# EAGLE board vr60 (EAGLE 9.6.2)
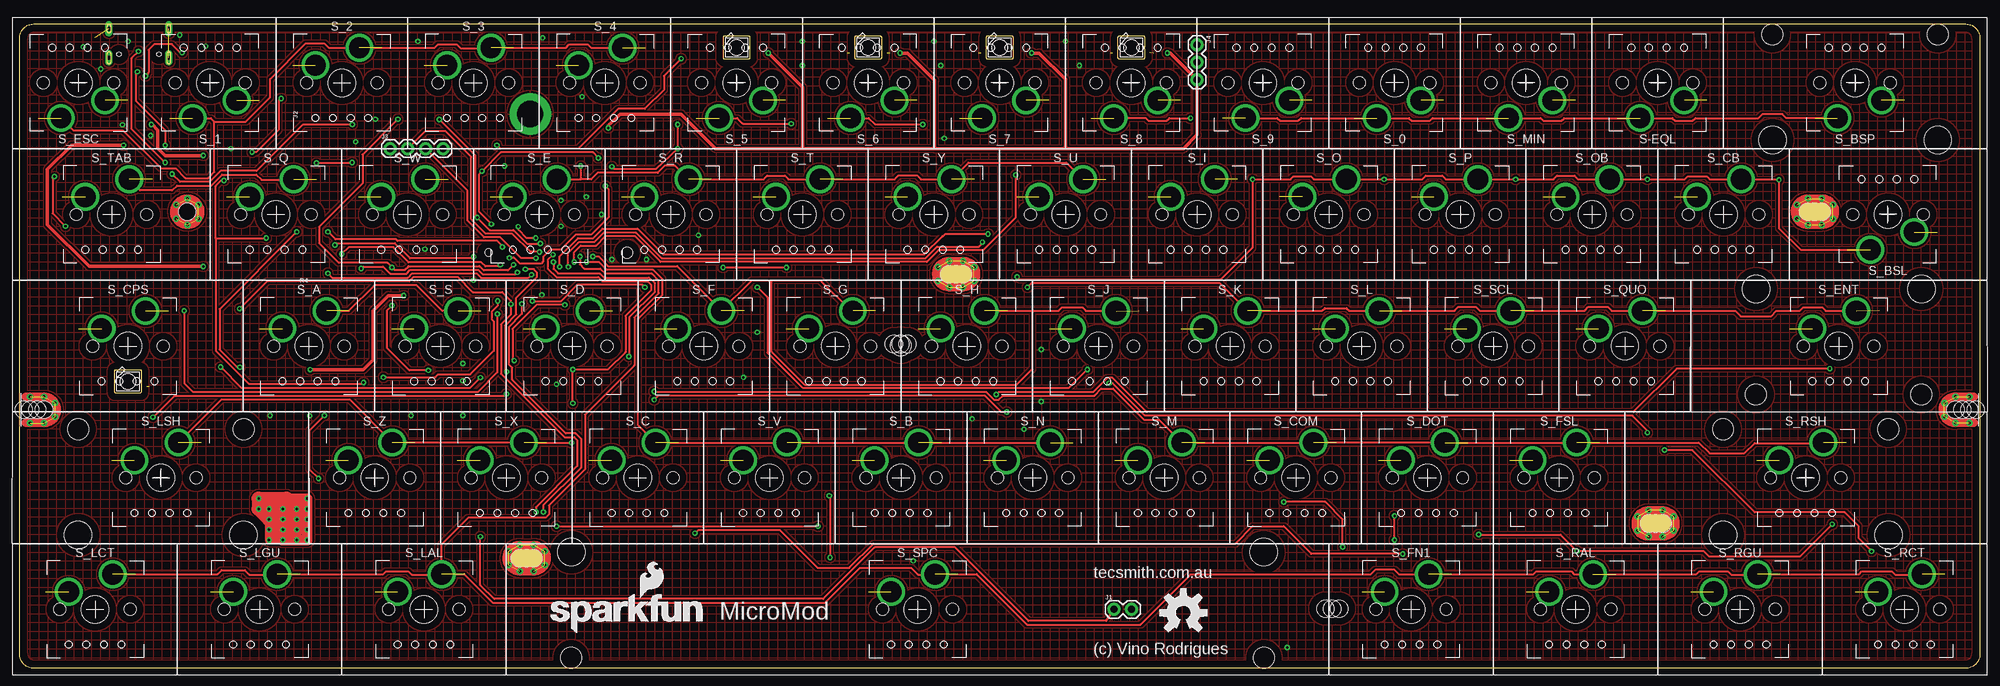
[diagram p0: board, top side]
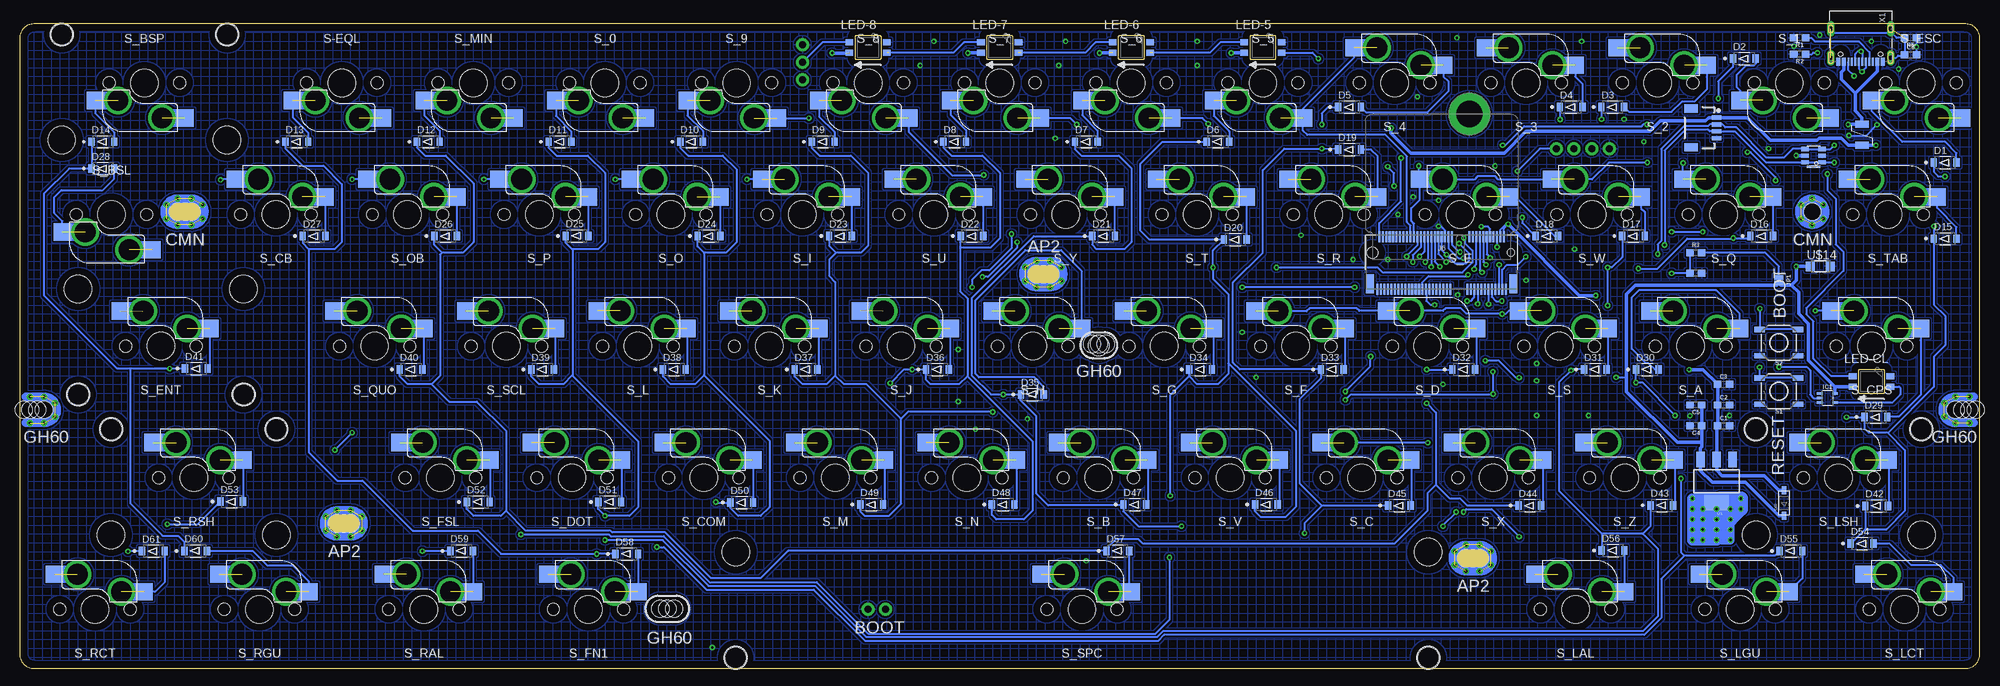
[diagram p1: board, bottom side, seen from below]

Size 283 x 93 mm. Coordinates in mm from the lower left corner, seen from the top.
Outline: 283,91 283,2 arc-90 281,0 2,0 arc-90 0,2 0,91 arc-90 2,93 281,93 arc-90 283,91
Copper layers (1*16): Top 0.035mm / dielectric 1.5mm / Bottom 0.035mm
Design rules "default *": minimum track width 10mil, minimum drill 0.35mm, track to track 10mil, track to pad 10mil, pad to pad 10mil, via to via 10mil, smd to smd 10mil, copper to edge 40mil, drill to drill 10mil, minimum pad ring 10mil, minimum via ring 8mil, stop-mask expansion 4mil, vias tented up to drill 0mil, thermal gap 10mil
Net classes: 0 default: width 0 mm, drill 0 mm
Holes 3 mm at 127.2,46.6
Holes 2.5 mm at 24.2,65.9 259.05,65.9 127.2,46.8 1.5,37.3 281.5,37.3 189.5,8.6 135.2,56.9 73.2,15.9 236.2,20.9 128.2,46.8 126.2,46.8 188.5,8.6 190.5,8.6

## Footprints (pad centres in the part's own frame; a part is rotated, then mirrored left to right if it is on the bottom)
MX-STABS-200U = hole 3.988: -11.938,8.255; 11.938,8.255 | hole 3.048: -11.938,-6.985; 11.938,-6.985
MX-STABS-625U = hole 3.988: -50,8.255; 50,8.255 | hole 3.048: -50,-6.985; 50,-6.985
0603 = smd 1.1 x 1: 1 -0.85,0; 2 0.85,0
SOD-123 = smd 0.914 x 1.219: A 1.638,0; C -1.638,0
SOD-123' = smd 1.2 x 0.7: A 1.85,0; C -1.85,0
STAND-OFF-REFLOW-M2.5 = drill 3.8 pad 6: 1 0,0
SC-74A = smd 0.375 x 0.825: 1 -0.65,-1.087; 2 0,-1.087; 3 0.65,-1.087; 4 0.65,1.087; 5 -0.65,1.087
1X02 = drill 1.016 pad 1.88: 1 0,0; 2 2.54,0
1X04_1MM_RA = smd 0.6 x 1.35: 1 -1.5,0; 2 -0.5,0; 3 0.5,0; 4 1.5,0 | smd 1.2 x 2: NC1 2.8,-3.675; NC2 -2.8,-3.675
1X04 = drill 1.016 pad 1.88: 1 0,0; 2 2.54,0; 3 5.08,0; 4 7.62,0
1X03 = drill 1.016 pad 1.88: 1 0,0; 2 2.54,0; 3 5.08,0
M.2-CONNECTOR-E = smd 0.3 x 1.55: 1 9.25,-5.275; 2 9,2.275; 3 8.75,-5.275; 4 8.5,2.275; 5 8.25,-5.275; 6 8,2.275; 7 7.75,-5.275; 8 7.5,2.275; 9 7.25,-5.275; 10 7,2.275; 11 6.75,-5.275; 12 6.5,2.275; 13 6.25,-5.275; 14 6,2.275; 15 5.75,-5.275; 16 5.5,2.275; 17 5.25,-5.275; 18 5,2.275; 19 4.75,-5.275; 20 4.5,2.275; 21 4.25,-5.275; 22 4,2.275; 23 3.75,-5.275; 32 1.5,2.275; 33 1.25,-5.275; 34 1,2.275; 35 0.75,-5.275; 36 0.5,2.275; 37 0.25,-5.275; 38 0,2.275; 39 -0.25,-5.275; 40 -0.5,2.275; 41 -0.75,-5.275; 42 -1,2.275; 43 -1.25,-5.275; 44 -1.5,2.275; 45 -1.75,-5.275; 46 -2,2.275; 47 -2.25,-5.275; 48 -2.5,2.275; 49 -2.75,-5.275; 50 -3,2.275; 51 -3.25,-5.275; 52 -3.5,2.275; 53 -3.75,-5.275; 54 -4,2.275; 55 -4.25,-5.275; 56 -4.5,2.275; 57 -4.75,-5.275; 58 -5,2.275; 59 -5.25,-5.275; 60 -5.5,2.275; 61 -5.75,-5.275; 62 -6,2.275; 63 -6.25,-5.275; 64 -6.5,2.275; 65 -6.75,-5.275; 66 -7,2.275; 67 -7.25,-5.275; 68 -7.5,2.275; 69 -7.75,-5.275; 70 -8,2.275; 71 -8.25,-5.275; 72 -8.5,2.275; 73 -8.75,-5.275; 74 -9,2.275; 75 -9.25,-5.275 | smd 1.2 x 2.75: A1 10.35,-4.5; A2 -10.35,-4.5 | hole 1.1: 10,0 | hole 1.6: -10,0
SMT-JUMPER_2_NC_PASTE_NO-SILK = smd 0.635 x 1.27: 1 -0.406,0; 2 0.406,0
SK6812-E-MILL = smd 1.1 x 0.9 bottom: 1-VDD 2.7,-0.749; 2-DOUT 2.7,0.751; 3-GND -2.7,0.751; 4-DIN -2.7,-0.749
TACTILE_SWITCH_SMD_5.2MM = smd 1.524 x 0.762: 1 -2.794,1.905; 2 2.794,1.905; 3 -2.794,-1.905; 4 2.794,-1.905
MX-5-PIN-HOTSWAP-PAD = smd 2.55 x 2.5 bottom: P$1 -7.085,2.54; P$2 5.842,5.08 | drill 3 pad 3.75: P$3 -3.81,2.54; P$4 2.54,5.08 | hole 3.988: 0,0 | hole 1.75: -5.08,0; 5.08,0
MOUNTING-HOLE-WIDE = drill 0.4: P$2 -1,-1.9; P$3 -1,1.9; P$4 1,1.9; P$5 1,-1.9; P$7 2.6,-1; P$8 2.6,1; P$9 -2.6,1; P$10 -2.6,-1 | hole 2.5: -1,0; 1,0; 0,0
MOUNTING-HOLE = drill 0.4: P$2 0,-1.9; P$3 0,1.9; P$7 1.6,-1; P$8 1.6,1; P$9 -1.6,1; P$10 -1.6,-1 | hole 2.5: 0,0
MOUNTING-HOLE-VWIDE-C = drill 0.4: P$1 0,1.9; P$4 2,1.9; P$5 2,-1.9; P$6 0,-1.9; P$7 3.6,-1; P$8 3.6,1 | hole 2.5: 2,0; 0,0; 1,0; -0.9,0
SOT223 = smd 1.219 x 2.235: 1 -2.311,-3.099; 2 0,-3.099; 3 2.311,-3.099 | smd 3.6 x 2.2: 4 0,3.099
SOT-23-6L = smd 0.6 x 1.1: P$1 -0.95,-1.25; P$2 0,-1.25; P$3 0.95,-1.25; P$4 0.95,1.25; P$5 0,1.25; P$6 -0.95,1.25
SMD_PTC = smd 1 x 1.9: P$1 -1.5,0; P$2 1.5,0
SOD123FL-BI = smd 1.3 x 1.4: P$1 -1.45,0; P$2 1.45,0
USB_C_CUSB31-CFM2AX-01-X = smd 0.575 x 1.15: A1B12 -3.2,7.355; A4B9 -2.4,7.355; B1A12 3.2,7.355; B4A9 2.4,7.355 | smd 0.275 x 1.15: A5 -1.25,7.355; A6 -0.25,7.355; A7 0.25,7.355; A8 1.25,7.355; B5 1.75,7.355; B6 0.75,7.355; B7 -0.75,7.355; B8 -1.75,7.355 | drill 0.6 pad 1 long: M1 -4.32,6.78; M2 4.32,6.78; M3 -4.32,2.6; M4 4.32,2.6 | hole 0.65: 2.89,6.28; -2.89,6.28

## Placement (x,y rotation side)
B14  MX-STABS-200U  [MX-STABS-200U]  265,84.5 180 top
B41  MX-STABS-200U  [MX-STABS-200U]  262.62,46.5 0 top
B42  MX-STABS-200U  [MX-STABS-200U]  20.38,27.5 180 top
B53  MX-STABS-200U  [MX-STABS-200U]  257.88,27.5 180 top
B57  MX-STABS-625U  [MX-STABS-625U]  129.62,8.5 0 top
C1  0.1uF  [0603]  37,35 0 bottom
C2  0.22uF  [0603]  37,38 0 bottom
C3  1nF  [0603]  37,41 0 bottom
C4  0.1uF  [0603]  41,35 180 bottom
C5  0.22uF  [0603]  41,38 180 bottom
C6  4.7nF  [0603]  10,88.55 0 bottom
D1  [SOD-123]  5,73 0 bottom
D2  [SOD-123]  34,88 0 bottom
D3  [SOD-123]  53,81 0 bottom
D4  [SOD-123]  59,81 0 bottom
D5  [SOD-123]  91,81 0 bottom
D6  [SOD-123]  110,76 0 bottom
D7  [SOD-123]  129,76 0 bottom
D8  [SOD-123]  148,76 0 bottom
D9  [SOD-123]  167,76 0 bottom
D10  [SOD-123]  186,76 0 bottom
D11  [SOD-123]  205,76 0 bottom
D12  [SOD-123]  224,76 0 bottom
D13  [SOD-123]  243,76 0 bottom
D14  [SOD-123]  271,76 0 bottom
D15  [SOD-123]  5,62 0 bottom
D16  [SOD-123]  31.5,62.38 0 bottom
D17  [SOD-123]  50,62.38 0 bottom
D18  [SOD-123]  62.5,62.38 0 bottom
D19  [SOD-123]  91,74.88 0 bottom
D20  [SOD-123]  107.5,61.88 0 bottom
D21  [SOD-123]  126.5,62.38 0 bottom
D22  [SOD-123]  145.5,62.38 0 bottom
D23  [SOD-123]  164.5,62.38 0 bottom
D24  [SOD-123]  183.5,62.38 0 bottom
D25  [SOD-123]  202.55,62.42 0 bottom
D26  [SOD-123]  221.5,62.38 0 bottom
D27  [SOD-123]  240.5,62.38 0 bottom
D28  [SOD-123]  271,72.12 0 bottom
D29  [SOD-123]  15,36.25 0 bottom
D30  [SOD-123]  48,43.12 0 bottom
D31  [SOD-123]  55.5,43.12 0 bottom
D32  [SOD-123]  74.5,43.12 0 bottom
D33  [SOD-123]  93.5,43.12 0 bottom
D34  [SOD-123]  112.5,43.12 0 bottom
D35  [SOD-123]  136.8,39.52 0 bottom
D36  [SOD-123]  150.5,43.12 0 bottom
D37  [SOD-123]  169.5,43.12 0 bottom
D38  [SOD-123]  188.5,43.12 0 bottom
D39  [SOD-123]  207.5,43.12 0 bottom
D40  [SOD-123]  226.5,43.12 0 bottom
D41  [SOD-123]  257.5,43.25 0 bottom
D42  [SOD-123]  14.9,23.45 0 bottom
D43  [SOD-123]  45.9,23.52 0 bottom
D44  [SOD-123]  64.95,23.48 0 bottom
D45  [SOD-123]  83.8,23.48 0 bottom
D46  [SOD-123]  103,23.62 0 bottom
D47  [SOD-123]  122,23.62 0 bottom
D48  [SOD-123]  141,23.62 0 bottom
D49  [SOD-123]  160,23.62 0 bottom
D50  [SOD-123]  178.75,23.93 0 bottom
D51  [SOD-123]  197.8,24.02 0 bottom
D52  [SOD-123]  216.8,24.02 0 bottom
D53  [SOD-123]  252.4,24.05 0 bottom
D54  [SOD-123]  17,18 0 bottom
D55  [SOD-123]  27.25,16.95 0 bottom
D56  [SOD-123]  52.95,17 0 bottom
D57  [SOD-123]  124.45,16.95 0 bottom
D58  [SOD-123]  195.35,16.5 0 bottom
D59  [SOD-123]  219.2,16.95 0 bottom
D60  [SOD-123]  257.6,16.95 0 bottom
D61  [SOD-123]  263.7,16.9 0 bottom
D62  1N4148  [SOD-123']  28.25,23.85 90 bottom
H5  STAND-OFF-REFLOW2.5MM_TALL  [STAND-OFF-REFLOW-M2.5]  73.7,80 0 top
IC1  MC74VHC1G50  [SC-74A]  22,39 270 bottom
J1  [1X02]  158,8.5 0 top
J2  [1X04_1MM_RA]  38,78 270 bottom
J3  [1X04]  53.5,75 0 top
J4  [1X03]  170,90 270 top
J6  MICROMOD-2222-C  [M.2-CONNECTOR-E]  77.7,60 0 bottom
JP1  OPT  [SMT-JUMPER_2_NC_PASTE_NO-SILK]  29,56 270 bottom
LED-5  SK6812-E-REVERSE  [SK6812-E-MILL]  103.5,89.6 0 top
LED-6  SK6812-E-REVERSE  [SK6812-E-MILL]  122.5,89.6 0 top
LED-7  SK6812-E-REVERSE  [SK6812-E-MILL]  141.5,89.6 0 top
LED-8  SK6812-E-REVERSE  [SK6812-E-MILL]  160.5,89.6 0 top
LED-CL  SK6812-E-REVERSE  [SK6812-E-MILL]  15.62,41.4 0 top
LOGO1  OSHW-LOGOL  [OSHW-LOGO-L]  168,8 0 top
R1  1.5k  [0603]  26,91 180 bottom
R2  1.5k  [0603]  26,88.65 180 bottom
R3  150k  [0603]  41,60 0 bottom
R4  75K  [0603]  41,57 180 bottom
R5  1000K  [0603]  10,91 180 bottom
S1  Reset  [TACTILE_SWITCH_SMD_5.2MM]  29,40 180 bottom
S2  BOOT  [TACTILE_SWITCH_SMD_5.2MM]  29,47 180 bottom
S-EQL  MX-5-PIN-HOTSWAP-PAD  [MX-5-PIN-HOTSWAP-PAD]  236.5,84.5 180 top
S_0  MX-5-PIN-HOTSWAP-PAD  [MX-5-PIN-HOTSWAP-PAD]  198.5,84.5 180 top
S_1  MX-5-PIN-HOTSWAP-PAD  [MX-5-PIN-HOTSWAP-PAD]  27.5,84.5 180 top
S_2  MX-5-PIN-HOTSWAP-PAD  [MX-5-PIN-HOTSWAP-PAD]  46.5,84.5 0 top
S_3  MX-5-PIN-HOTSWAP-PAD  [MX-5-PIN-HOTSWAP-PAD]  65.5,84.5 0 top
S_4  MX-5-PIN-HOTSWAP-PAD  [MX-5-PIN-HOTSWAP-PAD]  84.5,84.5 0 top
S_5  MX-5-PIN-HOTSWAP-PAD  [MX-5-PIN-HOTSWAP-PAD]  103.5,84.5 180 top
S_6  MX-5-PIN-HOTSWAP-PAD  [MX-5-PIN-HOTSWAP-PAD]  122.5,84.5 180 top
S_7  MX-5-PIN-HOTSWAP-PAD  [MX-5-PIN-HOTSWAP-PAD]  141.5,84.5 180 top
S_8  MX-5-PIN-HOTSWAP-PAD  [MX-5-PIN-HOTSWAP-PAD]  160.5,84.5 180 top
S_9  MX-5-PIN-HOTSWAP-PAD  [MX-5-PIN-HOTSWAP-PAD]  179.5,84.5 180 top
S_A  MX-5-PIN-HOTSWAP-PAD  [MX-5-PIN-HOTSWAP-PAD]  41.75,46.5 0 top
S_B  MX-5-PIN-HOTSWAP-PAD  [MX-5-PIN-HOTSWAP-PAD]  127.25,27.5 0 top
S_BSL  MX-5-PIN-HOTSWAP-PAD  [MX-5-PIN-HOTSWAP-PAD]  269.75,65.5 180 top
S_BSP  MX-5-PIN-HOTSWAP-PAD  [MX-5-PIN-HOTSWAP-PAD]  265,84.5 180 top
S_C  MX-5-PIN-HOTSWAP-PAD  [MX-5-PIN-HOTSWAP-PAD]  89.25,27.5 0 top
S_CB  MX-5-PIN-HOTSWAP-PAD  [MX-5-PIN-HOTSWAP-PAD]  246,65.5 0 top
S_COM  MX-5-PIN-HOTSWAP-PAD  [MX-5-PIN-HOTSWAP-PAD]  184.25,27.5 0 top
S_CPS  MX-5-PIN-HOTSWAP-PAD  [MX-5-PIN-HOTSWAP-PAD]  15.62,46.5 0 top
S_D  MX-5-PIN-HOTSWAP-PAD  [MX-5-PIN-HOTSWAP-PAD]  79.75,46.5 0 top
S_DOT  MX-5-PIN-HOTSWAP-PAD  [MX-5-PIN-HOTSWAP-PAD]  203.25,27.5 0 top
S_E  MX-5-PIN-HOTSWAP-PAD  [MX-5-PIN-HOTSWAP-PAD]  75,65.5 0 top
S_ENT  MX-5-PIN-HOTSWAP-PAD  [MX-5-PIN-HOTSWAP-PAD]  262.62,46.5 0 top
S_ESC  MX-5-PIN-HOTSWAP-PAD  [MX-5-PIN-HOTSWAP-PAD]  8.5,84.5 180 top
S_F  MX-5-PIN-HOTSWAP-PAD  [MX-5-PIN-HOTSWAP-PAD]  98.75,46.5 0 top
S_FN1  MX-5-PIN-HOTSWAP-PAD  [MX-5-PIN-HOTSWAP-PAD]  200.88,8.5 0 top
S_FSL  MX-5-PIN-HOTSWAP-PAD  [MX-5-PIN-HOTSWAP-PAD]  222.25,27.5 0 top
S_G  MX-5-PIN-HOTSWAP-PAD  [MX-5-PIN-HOTSWAP-PAD]  117.75,46.5 0 top
S_H  MX-5-PIN-HOTSWAP-PAD  [MX-5-PIN-HOTSWAP-PAD]  136.75,46.5 0 top
S_I  MX-5-PIN-HOTSWAP-PAD  [MX-5-PIN-HOTSWAP-PAD]  170,65.5 0 top
S_J  MX-5-PIN-HOTSWAP-PAD  [MX-5-PIN-HOTSWAP-PAD]  155.75,46.5 0 top
S_K  MX-5-PIN-HOTSWAP-PAD  [MX-5-PIN-HOTSWAP-PAD]  174.75,46.5 0 top
S_L  MX-5-PIN-HOTSWAP-PAD  [MX-5-PIN-HOTSWAP-PAD]  193.75,46.5 0 top
S_LAL  MX-5-PIN-HOTSWAP-PAD  [MX-5-PIN-HOTSWAP-PAD]  58.38,8.5 0 top
S_LCT  MX-5-PIN-HOTSWAP-PAD  [MX-5-PIN-HOTSWAP-PAD]  10.88,8.5 0 top
S_LGU  MX-5-PIN-HOTSWAP-PAD  [MX-5-PIN-HOTSWAP-PAD]  34.62,8.5 0 top
S_LSH  MX-5-PIN-HOTSWAP-PAD  [MX-5-PIN-HOTSWAP-PAD]  20.38,27.5 0 top
S_M  MX-5-PIN-HOTSWAP-PAD  [MX-5-PIN-HOTSWAP-PAD]  165.25,27.5 0 top
S_MIN  MX-5-PIN-HOTSWAP-PAD  [MX-5-PIN-HOTSWAP-PAD]  217.5,84.5 180 top
S_N  MX-5-PIN-HOTSWAP-PAD  [MX-5-PIN-HOTSWAP-PAD]  146.25,27.5 0 top
S_O  MX-5-PIN-HOTSWAP-PAD  [MX-5-PIN-HOTSWAP-PAD]  189,65.5 0 top
S_OB  MX-5-PIN-HOTSWAP-PAD  [MX-5-PIN-HOTSWAP-PAD]  227,65.5 0 top
S_P  MX-5-PIN-HOTSWAP-PAD  [MX-5-PIN-HOTSWAP-PAD]  208,65.5 0 top
S_Q  MX-5-PIN-HOTSWAP-PAD  [MX-5-PIN-HOTSWAP-PAD]  37,65.5 0 top
S_QUO  MX-5-PIN-HOTSWAP-PAD  [MX-5-PIN-HOTSWAP-PAD]  231.75,46.5 0 top
S_R  MX-5-PIN-HOTSWAP-PAD  [MX-5-PIN-HOTSWAP-PAD]  94,65.5 0 top
S_RAL  MX-5-PIN-HOTSWAP-PAD  [MX-5-PIN-HOTSWAP-PAD]  224.62,8.5 0 top
S_RCT  MX-5-PIN-HOTSWAP-PAD  [MX-5-PIN-HOTSWAP-PAD]  272.12,8.5 0 top
S_RGU  MX-5-PIN-HOTSWAP-PAD  [MX-5-PIN-HOTSWAP-PAD]  248.38,8.5 0 top
S_RSH  MX-5-PIN-HOTSWAP-PAD  [MX-5-PIN-HOTSWAP-PAD]  257.88,27.5 0 top
S_S  MX-5-PIN-HOTSWAP-PAD  [MX-5-PIN-HOTSWAP-PAD]  60.75,46.5 0 top
S_SCL  MX-5-PIN-HOTSWAP-PAD  [MX-5-PIN-HOTSWAP-PAD]  212.75,46.5 0 top
S_SPC  MX-5-PIN-HOTSWAP-PAD  [MX-5-PIN-HOTSWAP-PAD]  129.62,8.5 0 top
S_T  MX-5-PIN-HOTSWAP-PAD  [MX-5-PIN-HOTSWAP-PAD]  113,65.5 0 top
S_TAB  MX-5-PIN-HOTSWAP-PAD  [MX-5-PIN-HOTSWAP-PAD]  13.25,65.5 0 top
S_U  MX-5-PIN-HOTSWAP-PAD  [MX-5-PIN-HOTSWAP-PAD]  151,65.5 0 top
S_V  MX-5-PIN-HOTSWAP-PAD  [MX-5-PIN-HOTSWAP-PAD]  108.25,27.5 0 top
S_W  MX-5-PIN-HOTSWAP-PAD  [MX-5-PIN-HOTSWAP-PAD]  56,65.5 0 top
S_X  MX-5-PIN-HOTSWAP-PAD  [MX-5-PIN-HOTSWAP-PAD]  70.25,27.5 0 top
S_Y  MX-5-PIN-HOTSWAP-PAD  [MX-5-PIN-HOTSWAP-PAD]  132,65.5 0 top
S_Z  MX-5-PIN-HOTSWAP-PAD  [MX-5-PIN-HOTSWAP-PAD]  51.25,27.5 0 top
SA1  MOUNTING-HOLE-WIDE  [MOUNTING-HOLE-WIDE]  73.2,15.9 0 top
SA2  MOUNTING-HOLE-WIDE  [MOUNTING-HOLE-WIDE]  135.2,56.9 0 top
SA3  MOUNTING-HOLE-WIDE  [MOUNTING-HOLE-WIDE]  236.2,20.9 0 top
SC1  MOUNTING-HOLE  [MOUNTING-HOLE]  24.2,65.9 0 top
SC2  MOUNTING-HOLE-WIDE  [MOUNTING-HOLE-WIDE]  259.2,65.9 0 top
SG1  MOUNTING-HOLE-VWIDEEDGE-CUT  [MOUNTING-HOLE-VWIDE-C]  1.5,37.3 0 top
SG4  MOUNTING-HOLE-VWIDEEDGE-CUT  [MOUNTING-HOLE-VWIDE-C]  281.5,37.3 180 top
U1  [SOT223]  38,27 180 bottom
U$3  ESD_SRV05-4  [SOT-23-6L]  24,74 90 bottom
U$5  SPARKFUN_LOGO0.2  [SFE_LOGO_NAME_FLAME_.2]  76,5 0 top
U$7  PTC_ASMD1206  [SMD_PTC]  17,77 270 bottom
U$14  TVS_SMF9.0CA  [SOD123FL-BI]  23,58 0 bottom
X1  [USB_C_CUSB31-CFM2AX-01-X]  17.2,94.9 180 bottom
Z1  MX-FPRINT-100U19  [MX-FPRINT-1900-100U]  8.5,84.5 90 top
Z2  MX-FPRINT-100U19  [MX-FPRINT-1900-100U]  27.5,84.5 90 top
Z3  MX-FPRINT-100U19  [MX-FPRINT-1900-100U]  46.5,84.5 0 top
Z4  MX-FPRINT-100U19  [MX-FPRINT-1900-100U]  65.5,84.5 0 top
Z5  MX-FPRINT-100U19  [MX-FPRINT-1900-100U]  84.5,84.5 0 top
Z6  MX-FPRINT-100U19  [MX-FPRINT-1900-100U]  103.5,84.5 0 top
Z7  MX-FPRINT-100U19  [MX-FPRINT-1900-100U]  122.5,84.5 0 top
Z8  MX-FPRINT-100U19  [MX-FPRINT-1900-100U]  141.5,84.5 0 top
Z9  MX-FPRINT-100U19  [MX-FPRINT-1900-100U]  160.5,84.5 90 top
Z10  MX-FPRINT-100U19  [MX-FPRINT-1900-100U]  179.5,84.5 0 top
Z11  MX-FPRINT-100U19  [MX-FPRINT-1900-100U]  198.5,84.5 270 top
Z12  MX-FPRINT-100U19  [MX-FPRINT-1900-100U]  217.5,84.5 0 top
Z13  MX-FPRINT-100U19  [MX-FPRINT-1900-100U]  236.5,84.5 0 top
Z14  MX-FPRINT-200U19  [MX-FPRINT-1900-200U]  265,84.5 0 top
Z15  MX-FPRINT-150U19  [MX-FPRINT-1900-150U]  13.25,65.5 0 top
Z16  MX-FPRINT-100U19  [MX-FPRINT-1900-100U]  37,65.5 0 top
Z17  MX-FPRINT-100U19  [MX-FPRINT-1900-100U]  56,65.5 0 top
Z18  MX-FPRINT-100U19  [MX-FPRINT-1900-100U]  75,65.5 90 top
Z19  MX-FPRINT-100U19  [MX-FPRINT-1900-100U]  94,65.5 0 top
Z20  MX-FPRINT-100U19  [MX-FPRINT-1900-100U]  113,65.5 0 top
Z21  MX-FPRINT-100U19  [MX-FPRINT-1900-100U]  132,65.5 0 top
Z22  MX-FPRINT-100U19  [MX-FPRINT-1900-100U]  151,65.5 0 top
Z23  MX-FPRINT-100U19  [MX-FPRINT-1900-100U]  170,65.5 0 top
Z24  MX-FPRINT-100U19  [MX-FPRINT-1900-100U]  189,65.5 0 top
Z25  MX-FPRINT-100U19  [MX-FPRINT-1900-100U]  208,65.5 0 top
Z26  MX-FPRINT-100U19  [MX-FPRINT-1900-100U]  227,65.5 0 top
Z27  MX-FPRINT-100U19  [MX-FPRINT-1900-100U]  246,65.5 0 top
Z28  MX-FPRINT-150U19  [MX-FPRINT-1900-150U]  269.75,65.5 0 top
Z29  MX-FPRINT-175U19  [MX-FPRINT-1900-175U]  15.62,46.5 0 top
Z30  MX-FPRINT-100U19  [MX-FPRINT-1900-100U]  41.75,46.5 0 top
Z31  MX-FPRINT-100U19  [MX-FPRINT-1900-100U]  60.75,46.5 0 top
Z32  MX-FPRINT-100U19  [MX-FPRINT-1900-100U]  79.75,46.5 0 top
Z33  MX-FPRINT-100U19  [MX-FPRINT-1900-100U]  98.75,46.5 0 top
Z34  MX-FPRINT-100U19  [MX-FPRINT-1900-100U]  117.75,46.5 0 top
Z35  MX-FPRINT-100U19  [MX-FPRINT-1900-100U]  136.75,46.5 0 top
Z36  MX-FPRINT-100U19  [MX-FPRINT-1900-100U]  155.75,46.5 0 top
Z37  MX-FPRINT-100U19  [MX-FPRINT-1900-100U]  174.75,46.5 0 top
Z38  MX-FPRINT-100U19  [MX-FPRINT-1900-100U]  193.75,46.5 0 top
Z39  MX-FPRINT-100U19  [MX-FPRINT-1900-100U]  212.75,46.5 0 top
Z40  MX-FPRINT-100U19  [MX-FPRINT-1900-100U]  231.75,46.5 0 top
Z41  MX-FPRINT-225U19  [MX-FPRINT-1900-225U]  262.62,46.5 0 top
Z42  MX-FPRINT-225U19  [MX-FPRINT-1900-225U]  20.38,27.5 0 top
Z43  MX-FPRINT-100U19  [MX-FPRINT-1900-100U]  51.25,27.5 90 top
Z44  MX-FPRINT-100U19  [MX-FPRINT-1900-100U]  70.25,27.5 0 top
Z45  MX-FPRINT-100U19  [MX-FPRINT-1900-100U]  89.25,27.5 0 top
Z46  MX-FPRINT-100U19  [MX-FPRINT-1900-100U]  108.25,27.5 0 top
Z47  MX-FPRINT-100U19  [MX-FPRINT-1900-100U]  127.25,27.5 0 top
Z48  MX-FPRINT-100U19  [MX-FPRINT-1900-100U]  146.25,27.5 0 top
Z49  MX-FPRINT-100U19  [MX-FPRINT-1900-100U]  165.25,27.5 0 top
Z50  MX-FPRINT-100U19  [MX-FPRINT-1900-100U]  184.25,27.5 0 top
Z51  MX-FPRINT-100U19  [MX-FPRINT-1900-100U]  203.25,27.5 0 top
Z52  MX-FPRINT-100U19  [MX-FPRINT-1900-100U]  222.25,27.5 0 top
Z53  MX-FPRINT-275U19  [MX-FPRINT-1900-275U]  257.88,27.5 0 top
Z54  MX-FPRINT-125U19  [MX-FPRINT-1900-125U]  10.88,8.5 0 top
Z55  MX-FPRINT-125U19  [MX-FPRINT-1900-125U]  34.62,8.5 0 top
Z56  MX-FPRINT-125U19  [MX-FPRINT-1900-125U]  58.38,8.5 0 top
Z57  MX-FPRINT-625U19  [MX-FPRINT-1900-625U]  129.62,8.5 0 top
Z58  MX-FPRINT-125U19  [MX-FPRINT-1900-125U]  200.88,8.5 0 top
Z59  MX-FPRINT-125U19  [MX-FPRINT-1900-125U]  224.62,8.5 0 top
Z60  MX-FPRINT-125U19  [MX-FPRINT-1900-125U]  248.38,8.5 0 top
Z61  MX-FPRINT-125U19  [MX-FPRINT-1900-125U]  272.12,8.5 0 top

## Library data of the parts
B14 B41 B42 B53 B57 IC1 LED-5-LED-8 LED-CL S-EQL S_0 S_1-S_9 S_A S_B S_BSL S_BSP S_C S_CB S_COM S_CPS S_D S_DOT S_E S_ENT S_ESC S_F S_FN1 S_FSL S_G S_H S_I S_J S_K S_L S_LAL S_LCT S_LGU S_LSH S_M S_MIN S_N S_O S_OB S_P S_Q S_QUO S_R S_RAL S_RCT S_RGU S_RSH S_S S_SCL S_SPC S_T S_TAB S_U S_V S_W S_X S_Y S_Z SA1-SA3 SC1 SC2 SG1 SG4 U$3 U$7 U$14 X1 Z1-Z61 = ts_keyboards
C1 C4 C6 = SparkFun-Capacitors; PROD_ID: CAP-08604
C2 C5 = SparkFun-Capacitors; PROD_ID: CAP-07822
C3 = SparkFun-Capacitors; PROD_ID: CAP-07886
D1-D61 = jlcpcb_basic_parts
D62 = adafruit
H5 = SparkFun-Hardware; PROD_ID: HW-14899
J1 J4 = SparkFun-Connectors
J2 = __untitled
J3 = SparkFun-Connectors; PROD_ID: CONN-09696
J6 = SparkFun-MicroMod; PROD_ID: CONN-14877
JP1 = SparkFun-Jumpers
LOGO1 U$5 = random_logos
R1 R2 = SparkFun-Resistors; PROD_ID: RES-08306
R3 = SparkFun-Resistors; PROD_ID: RES-09117
R4 R5 = SparkFun-Resistors; PROD_ID: RES-09737
S1 S2 = SparkFun-Switches; PROD_ID: SWCH-14139
U1 = SparkFun-IC-Power; PROD_ID: VREG-08170

## Nets
!BOOT: J1.1 J6.11 S2.3 S2.4
!RESET: J6.6 S1.3 S1.4
A0: J3.3 J6.34
D+: J2.3 J6.3 U$3.P$1 U$3.P$6 X1.A6 X1.B6
D-: J2.2 J6.5 U$3.P$3 U$3.P$4 X1.A7 X1.B7
GND: C1.2 C2.2 C3.2 C4.2 C5.2 C6.2 H5.1 IC1.3 J1.2 J2.4 J3.1 J4.1 J6.1 J6.7 J6.33 J6.36 J6.39 J6.45 J6.75 LED-5.3-GND LED-6.3-GND LED-7.3-GND LED-8.3-GND LED-CL.3-GND R1.2 R2.2 R4.1 R5.1 S1.1 S1.2 S2.1 S2.2 U1.1 U$3.P$2 U$14.P$2 X1.A1B12 X1.B1A12
LED: IC1.2 J6.47
MX0: D1.C D9.C D15.C D23.C D29.C D37.C D42.C D49.C D54.C J6.18
MX1: D2.C D10.C D16.C D24.C D30.C D38.C D50.C D55.C J6.16
MX2: D3.C D11.C D17.C D25.C D31.C D39.C D43.C D51.C D56.C J6.14
MX3: D4.C D12.C D18.C D26.C D32.C D40.C D44.C D52.C D57.C J6.38
MX4: D5.C D13.C D19.C D27.C D33.C D45.C D58.C J6.12
MX5: D6.C D20.C D34.C D46.C D53.C D59.C J6.10
MX6: D7.C D14.C D21.C D28.C D35.C D41.C D47.C D60.C J6.17
MX7: D8.C D22.C D36.C D48.C D61.C J6.19
MY0: J6.56 S_1.P$2 S_1.P$4 S_2.P$2 S_2.P$4 S_3.P$2 S_3.P$4 S_4.P$2 S_4.P$4 S_5.P$2 S_5.P$4 S_6.P$2 S_6.P$4 S_7.P$2 S_7.P$4 S_ESC.P$2 S_ESC.P$4
MY1: J6.54 S_E.P$2 S_E.P$4 S_Q.P$2 S_Q.P$4 S_R.P$2 S_R.P$4 S_T.P$2 S_T.P$4 S_TAB.P$2 S_TAB.P$4 S_U.P$2 S_U.P$4 S_W.P$2 S_W.P$4 S_Y.P$2 S_Y.P$4
MY2: J6.52 S_A.P$2 S_A.P$4 S_CPS.P$2 S_CPS.P$4 S_D.P$2 S_D.P$4 S_F.P$2 S_F.P$4 S_G.P$2 S_G.P$4 S_H.P$2 S_H.P$4 S_J.P$2 S_J.P$4 S_S.P$2 S_S.P$4
MY3: J6.50 S_B.P$2 S_B.P$4 S_C.P$2 S_C.P$4 S_LSH.P$2 S_LSH.P$4 S_N.P$2 S_N.P$4 S_V.P$2 S_V.P$4 S_X.P$2 S_X.P$4 S_Z.P$2 S_Z.P$4
MY4: J6.48 S_FN1.P$2 S_FN1.P$4 S_LAL.P$2 S_LAL.P$4 S_LCT.P$2 S_LCT.P$4 S_LGU.P$2 S_LGU.P$4 S_RAL.P$2 S_RAL.P$4 S_RCT.P$2 S_RCT.P$4 S_RGU.P$2 S_RGU.P$4 S_SPC.P$2 S_SPC.P$4
MY5: J6.46 S-EQL.P$2 S-EQL.P$4 S_0.P$2 S_0.P$4 S_8.P$2 S_8.P$4 S_9.P$2 S_9.P$4 S_BSP.P$2 S_BSP.P$4 S_MIN.P$2 S_MIN.P$4
MY6: J6.44 S_BSL.P$2 S_BSL.P$4 S_CB.P$2 S_CB.P$4 S_I.P$2 S_I.P$4 S_O.P$2 S_O.P$4 S_OB.P$2 S_OB.P$4 S_P.P$2 S_P.P$4
MY7: J6.42 S_ENT.P$2 S_ENT.P$4 S_K.P$2 S_K.P$4 S_L.P$2 S_L.P$4 S_QUO.P$2 S_QUO.P$4 S_SCL.P$2 S_SCL.P$4
MY8: J6.40 S_COM.P$2 S_COM.P$4 S_DOT.P$2 S_DOT.P$4 S_FSL.P$2 S_FSL.P$4 S_M.P$2 S_M.P$4 S_RSH.P$2 S_RSH.P$4
N$1: D1.A S_ESC.P$1 S_ESC.P$3
N$2: D2.A S_1.P$1 S_1.P$3
N$3: D3.A S_2.P$1 S_2.P$3
N$4: D4.A S_3.P$1 S_3.P$3
N$5: D5.A S_4.P$1 S_4.P$3
N$6: D6.A S_5.P$1 S_5.P$3
N$7: D7.A S_6.P$1 S_6.P$3
N$8: D8.A S_7.P$1 S_7.P$3
N$9: D9.A S_8.P$1 S_8.P$3
N$10: D10.A S_9.P$1 S_9.P$3
N$11: D11.A S_0.P$1 S_0.P$3
N$12: D12.A S_MIN.P$1 S_MIN.P$3
N$13: D13.A S-EQL.P$1 S-EQL.P$3
N$14: D14.A S_BSP.P$1 S_BSP.P$3
N$15: D15.A S_TAB.P$1 S_TAB.P$3
N$16: D16.A S_Q.P$1 S_Q.P$3
N$17: D17.A S_W.P$1 S_W.P$3
N$18: D18.A S_E.P$1 S_E.P$3
N$19: D19.A S_R.P$1 S_R.P$3
N$20: D20.A S_T.P$1 S_T.P$3
N$21: D21.A S_Y.P$1 S_Y.P$3
N$22: D22.A S_U.P$1 S_U.P$3
N$23: D23.A S_I.P$1 S_I.P$3
N$24: D24.A S_O.P$1 S_O.P$3
N$25: D25.A S_P.P$1 S_P.P$3
N$26: D26.A S_OB.P$1 S_OB.P$3
N$27: D27.A S_CB.P$1 S_CB.P$3
N$28: D28.A S_BSL.P$1 S_BSL.P$3
N$29: LED-5.4-DIN LED-CL.2-DOUT
N$30: D30.A S_A.P$1 S_A.P$3
N$31: D31.A S_S.P$1 S_S.P$3
N$32: D32.A S_D.P$1 S_D.P$3
N$33: D33.A S_F.P$1 S_F.P$3
N$34: D34.A S_G.P$1 S_G.P$3
N$35: D35.A S_H.P$1 S_H.P$3
N$36: D36.A S_J.P$1 S_J.P$3
N$37: D37.A S_K.P$1 S_K.P$3
N$38: D38.A S_L.P$1 S_L.P$3
N$39: D39.A S_SCL.P$1 S_SCL.P$3
N$40: D40.A S_QUO.P$1 S_QUO.P$3
N$41: D41.A S_ENT.P$1 S_ENT.P$3
N$42: D42.A S_LSH.P$1 S_LSH.P$3
N$43: D43.A S_Z.P$1 S_Z.P$3
N$44: D44.A S_X.P$1 S_X.P$3
N$45: D45.A S_C.P$1 S_C.P$3
N$46: D46.A S_V.P$1 S_V.P$3
N$47: D47.A S_B.P$1 S_B.P$3
N$48: D48.A S_N.P$1 S_N.P$3
N$49: D49.A S_M.P$1 S_M.P$3
N$50: D50.A S_COM.P$1 S_COM.P$3
N$51: D51.A S_DOT.P$1 S_DOT.P$3
N$52: D52.A S_FSL.P$1 S_FSL.P$3
N$53: D53.A S_RSH.P$1 S_RSH.P$3
N$54: D54.A S_LCT.P$1 S_LCT.P$3
N$55: D55.A S_LGU.P$1 S_LGU.P$3
N$56: D56.A S_LAL.P$1 S_LAL.P$3
N$57: D57.A S_SPC.P$1 S_SPC.P$3
N$58: D58.A S_FN1.P$1 S_FN1.P$3
N$59: D59.A S_RAL.P$1 S_RAL.P$3
N$60: D60.A S_RGU.P$1 S_RGU.P$3
N$61: D61.A S_RCT.P$1 S_RCT.P$3
N$62: D29.A S_CPS.P$1 S_CPS.P$3
N$63: LED-5.2-DOUT LED-6.4-DIN
N$64: LED-6.2-DOUT LED-7.4-DIN
N$65: LED-7.2-DOUT LED-8.4-DIN
N$67: R1.1 X1.A5
N$68: JP1.1 R3.2
N$69: R2.1 X1.B5
N$70: IC1.4 LED-CL.4-DIN
N$71: C6.1 R5.2 X1.M1 X1.M2 X1.M3 X1.M4
N$72: J4.2 LED-8.2-DOUT
PWM: J3.2 J6.32
SA1: SA1.P$2 SA1.P$3 SA1.P$4 SA1.P$5 SA1.P$7 SA1.P$8 SA1.P$9 SA1.P$10
SA2: SA2.P$2 SA2.P$3 SA2.P$4 SA2.P$5 SA2.P$7 SA2.P$8 SA2.P$9 SA2.P$10
SA3: SA3.P$2 SA3.P$3 SA3.P$4 SA3.P$5 SA3.P$7 SA3.P$8 SA3.P$9 SA3.P$10
SC1: SC1.P$2 SC1.P$3 SC1.P$7 SC1.P$8 SC1.P$9 SC1.P$10
SC2: SC2.P$2 SC2.P$3 SC2.P$4 SC2.P$5 SC2.P$7 SC2.P$8 SC2.P$9 SC2.P$10
SG1: SG1.P$1 SG1.P$4 SG1.P$5 SG1.P$6 SG1.P$7 SG1.P$8
SG4: SG4.P$1 SG4.P$4 SG4.P$5 SG4.P$6 SG4.P$7 SG4.P$8
SINK: U1.4
SWDCK: J6.21
SWDIO: J6.23
VBUS: U$3.P$5 U$7.P$1 X1.A4B9 X1.B4A9
VCC: C1.1 C2.1 C3.1 D62.A J3.4 J6.2 J6.4 J6.74 U1.2
VIN/3: J6.49 R3.1 R4.2
VSUP: C4.1 C5.1 D62.C IC1.5 J2.1 J4.3 J6.9 JP1.2 LED-5.1-VDD LED-6.1-VDD LED-7.1-VDD LED-8.1-VDD LED-CL.1-VDD U1.3 U$7.P$2 U$14.P$1

## Tracks (layer width: path | path; a pad name or v marks a point on that pad's centre or on a via)
!BOOT  (via drill 0.35)
  Top 0.254: J1.1 156.85,6.85 145.65,6.85 135.05,17.45 123.45,17.45 116,10 68.5,10 66.5,12 v66.5,19 | v31.75,51.9 35.7,55.85 56.25,55.85 56.88,56.48 63.22,56.48 65.4,54.3 69.65,54.3 70.9,53.05 v70.9,52.55 70.9,51.05 69.5,49.65 69.5,42.5 78.65,33.35 80.05,33.35 80.5,32.9 80.5,29.21 74.55,23.25 v74.55,22.56
  Bottom 0.254: S2.3 S2.4 31.75,48.95 v31.75,51.9 | v70.9,52.55 70.95,52.6 J6.11 | v66.5,19 70.46,22.96 74.15,22.96 v74.55,22.56
!RESET  (via drill 0.35)
  Top 0.254: v69.7,60.8 69.7,60.95 68.95,61.7 54.54,61.7 54.34,61.9 45.6,61.9 v44.5,63 | v40,63 28.85,51.85 28.85,46 31.4,43.45 v31.8,43.45
  Bottom 0.254: J6.6 v69.7,60.8 | S1.3 S1.4 v31.8,43.45 | v44.5,63 v40,63
A0  (via drill 0.35)
  Top 0.254: v74.55,59.2 72.37,59.2 69.37,62.21 67.04,62.21 64.65,64.6 64.65,68.95 58.6,75 J3.3
  Bottom 0.254: J6.34 76.7,60.6 75.3,59.2 v74.55,59.2
D+  (via drill 0.35)
  Top 0.254: v21,73 16.2,77.8 16.2,88.1 v17.15,89.05 | v45.5,61.1 45.75,61.35 54.15,61.35 56.35,59.15 65.3,59.15 v65.55,59.4
  Bottom 0.254: X1.B6 17.95,88.7 17.6,89.05 v17.15,89.05 17.15,88.95 16.95,88.75 X1.A6 | v21,73 21.05,73.05 U$3.P$1 U$3.P$6 30.9,73.05 35.35,77.5 J2.3 39,77.5 39.25,77.75 42.5,77.75 45.5,74.75 v45.5,61.1 | v65.55,59.4 66.72,58.23 68.28,58.23 68.95,57.55 J6.3
D-  (via drill 0.35)
  Top 0.254: v17,86.1 16.75,85.85 16.75,81.9 21,77.65 v21,75.5 | v69.4,58.25 69.15,58 67.25,58 66.65,58.6 56.15,58.6 53.95,60.8 47.5,60.8 v46.5,59.8
  Bottom 0.254: X1.B7 16.45,86.65 v17,86.1 17.45,86.55 X1.A7 | v21,75.5 21.55,74.95 U$3.P$3 U$3.P$4 25.3,75 27,75 28.3,73.7 30.8,73.7 35.16,78.06 36.76,78.06 37.2,78.5 J2.2 39,78.5 39.24,78.26 42.71,78.26 46.01,74.96 46.01,61.69 46.5,61.2 v46.5,59.8 | v69.4,58.25 69.45,58.2 J6.5
GND  (via drill 0.35)
  Bottom 0.254: R5.1 v9.15,89.7 C6.2 | J6.36 77.2,63.2 77.8,63.8 v78.15,63.8 | v18.9,76.9 16.4,76.9 v14.85,78.45
  other vias: 183,3 98,62.5 70,72.5 77.5,41 57.5,90.5 75.5,91 58.5,60.5 147.5,46 78.15,67.55 90.5,59 85.5,59 81.8,68.05 132,90.5 133,87 153,87 151,90.5 133.5,76.5 113,90.5 113,87 36.15,36.5 41.85,36.45 26.85,89.8 11.7,86.5 15.65,90.5 23.1,91.4 81.2,82.5 84,65.5 75.4,53.9 137.5,36 104.5,42 64,44 30.5,75 65.5,56 64,41.5 64,36.5 56.5,36.5 129,15.5 51.35,79.25 48.5,76 145,34.5 147.5,38.5 106.5,48.5
  pour Top (hatched): 0,93 283,93 283,0 0,0
  pour Bottom (isolate 0.254, hatched): 0,93 283,93 283,0 0,0
LED  (via drill 0.35)
  Top 0.254: v66.5,41.95 64.99,40.44 32.06,40.44 v29,43.5 | v71.4,44.4 71.15,44.65 71.15,49 74.6,52.45 v78.7,52.45 v78.71,52.46
  Bottom 0.254: J6.47 79.93,54.7 79.93,53.02 79.29,52.46 v78.71,52.46 | v66.5,41.95 67,41.95 69.45,44.4 v71.4,44.4 | v29,43.5 25,43.5 24.5,43 24.5,39.5 24,39 IC1.2
MX0  (via drill 0.35)
  Top 0.254: v5,71 4.75,70.75 4.75,65.65 v6.6,63.8 | v19.25,36.25 22.35,39.35 70,39.35 v70.25,39.6 | v70.3,42.8 70.05,43.05 70.05,49.45 71.7,51.1 71.7,53.5 74.7,56.5 74.7,57.1 74.2,57.6 v73,57.6 | v142.5,37 141.7,37 139.35,39.35 92.2,39.35 v91.6,38.75
  Bottom 0.254: D1.C 6.64,71.64 6,71 v5,71 | v6.6,63.8 6.64,63.76 D15.C 6.64,52.5 5,50.86 5,46.64 6.64,45 6.64,40.6 13.24,34 | D54.C 16.54,20.1 | D42.C 16.54,20.1 | J6.18 72.72,62.25 72.72,58.28 73,58.01 v73,57.6 | D49.C 161.64,22.64 161,22 157.5,22 155.75,23.75 155.75,36 | 155.75,36 160.75,41 164,41 165.25,42.25 | D37.C 171.14,42.14 170,41 166.5,41 165.25,42.25 | D23.C 166.14,61 165.14,60 | 165.25,42.25 165.25,55.75 166.14,56.64 166.14,59 165.14,60 | D9.C 168.64,75.14 167.5,74 163,74 160.5,71.5 160.5,61 161.5,60 165.14,60 | v70.3,42.8 70.3,39.65 v70.25,39.6 70.35,39.5 90.85,39.5 v91.6,38.75 | v142.5,37 154.75,37 155.75,36 | 16.54,20.1 13.45,20.1 10.8,22.75 10.8,31.5 13.24,33.94 13.24,34 | v19.25,36.25 D29.C 16.64,34.64 16,34 13.24,34
MX1  (via drill 0.35)
  Top 0.254: v37.75,82.25 37.4,81.9 37.4,77.75 34.15,74.5 v33.55,74.5 | v29.5,70.42 29.1,70.42 28.3,69.62 28.3,62 | v71.85,57.15 71.6,56.9 66.8,56.9 66.2,57.5 56.4,57.5 55.85,56.95 53.5,56.95 52.46,57.99 49.59,57.99 v49.3,57.7 | v35.6,62.1 35.5,62 28.3,62 | v49.65,41.25 49.4,41 33.1,41 28.3,45.8 28.3,62 | v43.15,27.4 41.8,28.75 41.8,34.3 v44,36.5 | v191,17.5 191,21.5 188.5,24 v182.5,24
  Bottom 0.254: J6.16 72.2,57.5 v71.85,57.15 | D10.C 187.64,75.14 186.5,74 181.5,74 179.5,72 179.5,61.5 181,60 184.15,60 184.2,59.95 | D24.C 185.14,60.89 184.2,59.95 | 184.2,42.3 185.5,41 189,41 190.14,42.14 D38.C | 184.2,59.95 184.2,42.3 | 184.2,42.3 174.75,32.85 174.75,23.25 176,22 179.28,22 180.39,23.11 D50.C 182.43,23.93 v182.5,24 | D16.C 33.41,62.1 v35.6,62.1 35.7,62 42.25,62 46.55,57.7 v49.3,57.7 | D2.C 35.64,86.81 37.75,84.7 v37.75,82.25 | v33.55,74.5 33.1,74.5 29.5,70.9 v29.5,70.42 | D55.C 29.59,16.25 42.65,16.25 | v43.15,27.4 43.15,16.75 42.65,16.25 | v44,36.5 48.75,41.25 v49.65,41.25 49.64,41.26 D30.C | 42.65,16.25 45.99,12.91 45.99,7.26 48.45,4.8 117.76,4.8 118.58,3.98 160.98,3.98 168.35,11.35 183.85,11.35 190,17.5 v191,17.5
MX2  (via drill 0.35)
  Top 0.254: v54.6,79.25 49.5,74.15 49.5,70 43.2,63.7 43.2,61.35 46.05,58.5 53.1,58.5 v53.75,57.85 54.1,57.5 55.6,57.5 56.15,58.05 66.4,58.05 67,57.45 70.5,57.45 v71.3,58.25 | v59,43 56.25,43 53,46.25 53,51.6 v53.75,52.35 | v198.5,18.5 v198.5,22
  Bottom 0.254: v54.6,79.25 54.64,79.29 D3.C | D17.C 51.64,59.35 53.14,57.85 v53.75,57.85 v53.75,52.35 | J6.14 71.7,58.65 v71.3,58.25 | D11.C 206.64,75.14 205.5,74 201,74 198.5,71.5 198.5,61.5 199.5,60.5 203.2,60.5 | D25.C 204.19,61.44 203.25,60.5 203.2,60.5 | 203.2,60.5 203.2,42.3 203.22,42.27 | D39.C 209.14,42.14 208,41 204.5,41 203.22,42.27 | 203.22,42.27 193.7,32.75 193.7,23.25 194.95,22 v198.5,22 199.5,23 199.5,23.96 D51.C | D43.C 47.54,20.51 48.65,19.4 | 54.59,19.4 54.59,19.41 54.58,19.43 60.75,25.6 60.75,41.25 v59,43 58.88,43.12 D31.C | 54.59,19.4 D56.C | 48.65,19.4 54.59,19.4 | 48.65,19.4 46.5,17.25 46.5,7.5 48.64,5.36 48.67,5.36 48.66,5.35 117.93,5.35 118.79,4.49 160.75,4.49 168.16,11.9 183.55,11.9 183.56,11.89 190.17,18.5 v198.5,18.5
MX3  (via drill 0.35)
  Top 0.254: v60.6,79.2 65.75,74.05 65.75,65.35 v66.05,65.05 67.85,63.25 71.3,63.25 73.25,61.3 v75.16,61.3 | v77,59.7 76.25,58.95 76.25,57.7 77.5,56.45 83.55,56.45 84.15,55.85 90.65,55.85 91.15,55.35 91.15,54.55 87.45,50.85 87.45,45.65 84.91,43.11 v79.85,43.11 v79.85,38.25
  Bottom 0.254: v60.6,79.2 60.64,79.24 D4.C | D18.C 66.05,64.29 v66.05,65.05 | J6.38 77.7,60.4 v77,59.7 77,59.67 75.73,58.4 74.2,58.4 73.77,58.83 73.77,59.91 v75.16,61.3 | D12.C 225.64,75.14 224.5,74 221.5,74 217.5,70 217.5,61.5 219,60 222,60 | D26.C 223.14,61.14 222,60 | 222,60 222.3,59.7 222.3,42.2 223.5,41 | D40.C 228.14,42.14 227,41 223.5,41 | 223.5,41 221,38.5 217,38.5 212.8,34.3 212.8,22.7 | 212.8,22.7 213.5,22 217.5,22 218.5,23 218.5,23.96 D52.C | 212.8,22.7 209.95,19.85 197.7,19.85 197.45,19.6 189.8,19.6 183.2,13 176,13 172.05,16.95 D57.C 126.09,17.31 124.75,18.65 121.5,18.65 120.85,18 84.5,18 79.75,22.75 79.75,25.25 78.5,26.5 | D44.C 74,23.48 75.03,24.5 76.5,24.5 78.5,26.5 | v79.85,43.11 D32.C | 78.5,26.5 78.5,36.9 v79.85,38.25
MX4  (via drill 0.35)
  Top 0.254: v95,78.5 v95,75 91.82,72.05 85.85,72.05 v85.5,72.4 | v70.7,59.25 71.4,59.25 72.25,58.4 75.25,58.4 75.6,58.75 75.6,59.4 76.67,60.48 78.19,60.48 80.35,62.63 82.57,62.63 85,65.07 85,69.16 v84.56,69.6 | v97.5,19.5 97.95,19.95 109.75,19.95 115.2,14.5 119.75,14.5 123.25,18 175.5,18 178,20.5 182.5,20.5 186.5,16.5 v199.7,16.5
  Bottom 0.254: J6.12 71.2,59.75 v70.7,59.25 | v95,78.5 95,80.1 94.1,81 D5.C | D19.C 92.66,74.9 v95,75 100.4,75 103.5,71.9 103.5,60 107.8,55.7 107.8,44.1 106.83,43.12 D33.C 95.14,41.86 98.2,38.8 98.2,26.7 94.97,23.48 | v84.56,69.6 84.56,71.46 v85.5,72.4 | D13.C 244.64,75.04 242.15,72.55 239.15,72.55 236.5,69.9 236.5,61.5 237.5,60.5 241.25,60.5 | D27.C 242.14,61.39 241.25,60.5 | 241.25,60.5 241.25,31.2 237.15,27.1 233.5,27.1 226.25,19.85 216.85,19.85 213.5,16.5 v199.7,16.5 D58.C | D45.C 94.97,23.48 | 94.97,23.48 97.5,20.95 v97.5,19.5
MX5  (via drill 0.35)
  Top 0.254: v74.5,62.1 73.21,62.1 71.97,63.34 v71.97,63.74 | v101.55,57.85 v110.7,57.85 | v261.7,20.8 257.01,16.11 243.94,16.11 243.15,16.9 v224.85,16.9 222.45,19.3 v210.65,19.3 | v116.9,24.9 117,24.8 v117,16
  Bottom 0.254: J6.10 70.7,63.43 71.01,63.74 v71.97,63.74 | v101.55,57.85 86.95,57.85 86.25,57.15 74.7,57.15 73.26,58.59 73.26,60.27 74.28,61.29 74.28,61.88 v74.5,62.1 | D53.C 257.29,20.8 v261.7,20.8 | v224.85,16.9 224.8,16.95 D59.C | 108.5,44 108.5,54 110.7,56.2 v110.7,57.85 110.7,60.31 D20.C 119.88,61.88 121.15,63.15 121.15,72.85 118,76 D6.C | 108.5,44 108.5,42.5 110,41 113,41 114.14,42.14 | 114.14,42.14 D34.C | 114.14,42.14 114.15,42.15 116.9,39.4 v116.9,24.9 | 108.5,44 98.75,34.25 98.75,23.3 100.25,21.8 103.8,21.8 104.64,22.64 D46.C | v117,16 117,7 119,5 160.5,5 167.95,12.45 183.4,12.45 190.01,19.06 197.66,19.06 197.9,19.3 v210.65,19.3
MX6  (via drill 0.35)
  Top 0.254: v75.6,22.55 75.6,23.5 81.05,28.95 81.05,33.1 80.25,33.9 78.85,33.9 71.1,41.65 71.1,43.4 70.6,43.9 70.6,49.25 72.5,51.15 v72.5,52.6 | v77.5,20.5 v115.25,20.5 | v261.35,43.25 239.25,43.25 233,37 162.7,37 157.74,41.96 157.03,41.96 154.94,39.88 141.35,39.88 v141,39.52
  Bottom 0.254: D14.C D28.C 275.88,72.12 279.5,68.5 279.5,53.85 268.9,43.25 267,43.25 | D41.C v261.35,43.25 267,43.25 | 267,43.25 267,23.75 262.38,19.12 260.12,19.12 259.24,18.24 D60.C | D7.C 130.64,74.94 129.7,74 124.3,74 122.5,72.2 122.5,61.5 123.5,60.5 127.5,60.5 128.14,61.14 D21.C 136.57,62.38 145.55,53.4 145.55,42.3 142.78,39.52 v141,39.52 D35.C 138.5,39.46 138.5,38.7 136.2,36.4 136.2,25.2 134.5,23.5 123.76,23.5 D47.C 123.64,22.64 121.5,20.5 v115.25,20.5 | J6.17 72.45,52.65 v72.5,52.6 | v75.6,22.55 77.5,20.65 v77.5,20.5
MX7  (via drill 0.35)
  Top 0.254: v267.38,16.88 265.5,18.77 265.5,20.5 263.5,22.5 250.5,22.5 241.5,31.5 v237.5,31.5 | v235,34 235,34.3 232.85,36.45 162.5,36.45 157.8,41.15 v157.3,41.15 | v106.5,55 107.95,53.55 107.95,45.56 113.09,40.42 151.45,40.42 v154.15,43.12 | v74,53 78.15,53 80.49,55.34 89.91,55.34 v90.25,55
  Bottom 0.254: D8.C 149.64,75.14 148.5,74 144,74 141.5,71.5 141.5,62.05 142.85,60.7 147.14,60.7 | 147.14,60.7 D22.C | D61.C 267.37,16.9 v267.38,16.88 | v237.5,31.5 v235,34 | v157.3,41.15 155.32,43.12 v154.15,43.12 D36.C 152.14,41.64 151.5,41 147.35,41 146.18,42.17 146.15,42.15 | 146.15,42.15 136.75,32.75 136.75,22.75 138,21.5 142,21.5 142.64,22.14 D48.C | J6.19 73.02,54.65 73.02,53.48 73.5,53 v74,53 | v90.25,55 v106.5,55 | 147.14,60.7 147.14,54.38 146.15,53.39 146.15,42.15
MY0  (via drill 0.35)  (8 unrouted)
  Top 0.254: S_ESC.P$4 7.76,77.62 14.93,77.62 20.4,72.15 22.5,72.15 23.9,70.75 27.2,70.75 28.1,71.65 28.1,78.9 | S_1.P$4 27.58,79.42 28.1,78.9 | 28.1,78.9 32.65,78.9 36.15,82.4 36.15,85.05 41.3,90.2 43.95,90.2 44.57,89.58 S_2.P$4 59.93,89.58 60.4,90.05 63.1,90.05 63.65,89.5 67.96,89.5 S_3.P$4 78.88,89.58 79.35,90.05 82,90.05 82.47,89.58 S_4.P$4 | S_5.P$4 103.58,79.42 104.4,78.6 v111.4,78.6 | S_6.P$4 122.58,79.42 123.5,78.5 v130.4,78.5
  Bottom 0.254: J6.56 82.2,63.9 82.7,64.4 82.7,73.9 85.8,77 97.1,77 97.7,77.6 97.7,79.38 | 97.7,79.38 S_5.P$2 | S_4.P$2 90.34,88.16 97.7,80.8 97.7,79.38 | v111.4,78.6 112.22,79.42 S_6.P$2 | v130.4,78.5 131.32,79.42 S_7.P$2
MY1  (via drill 0.35)  (7 unrouted)
  Top 0.254: S_TAB.P$4 17.39,68.98 22,68.98 22.7,69.68 27.63,69.68 29.2,71.25 34.15,71.25 34.9,70.5 39.46,70.5 S_Q.P$4 | S_E.P$4 81,70.58 | 81,70.58 82.5,70.58 83.42,71.5 92.1,71.5 93.1,72.5 94.62,72.5 S_R.P$4 107.4,70.58 107.92,71.1 110.48,71.1 111,70.58 S_T.P$4 126.33,70.58 126.9,71.15 129.53,71.15 130.1,70.58 S_Y.P$4 136.96,73 151.12,73 S_U.P$4 | v81,72.5 81,70.58 | v42.85,72.95 42.9,73 v48,73
  Bottom 0.254: J6.54 81.7,64.17 82.1,64.56 82.1,66.4 80.84,67.66 S_E.P$2 81,70.74 v81,72.5 | S_W.P$2 61.87,70.55 69.5,70.55 69.95,71 72.55,71 73,70.55 77.51,70.55 S_E.P$4 | S_Q.P$2 v42.84,72.94 v42.85,72.95 | S_W.P$4 56,70.58 53.58,73 v48,73
MY2  (via drill 0.35)  (8 unrouted)
  Top 0.254: S_H.P$4 146.2,51.58 | 146.2,51.58 150,51.58 150.52,52.1 153.43,52.1 153.95,51.58 S_J.P$4 158.37,51.5 | 120,51.58 S_G.P$4 | v68.95,51.15 68.95,42.7 66.15,39.9 25,39.9 23.75,41.15 v23.75,51.6 | S_A.P$4 47.5,51.58 51.22,55.3 57.28,55.3 61,51.58 S_S.P$4 | v82.75,59.45 83.55,59.45 84.94,58.06 94.94,58.06 101.29,51.71 S_F.P$4 105.71,56 108.5,56 | 120.08,51.5 120,51.58 | 120,51.58 115.58,56 108.5,56 | 108.5,56 108.5,45.75 113.3,40.95 143.9,40.95 146.2,43.25 146.2,51.58
  Bottom 0.254: J6.52 81.2,61.05 82.75,59.5 v82.75,59.45 | S_S.P$2 68.02,51.58 68.45,51.15 v68.95,51.15 69.01,51.18 74.1,51.18 74.92,52 77.08,52 77.5,51.58 S_D.P$4 | S_D.P$2 89.58,51.58 90,52 96.7,52 97.2,51.5 101.21,51.5 S_F.P$4 | S_CPS.P$2 23.73,51.58 v23.75,51.6
MY3  (via drill 0.35)  (7 unrouted)
  Top 0.254: v81.85,58.65 83.6,58.65 84.75,57.5 91.45,57.5 92.8,56.15 92.8,53.95 89.3,50.45 89.3,35.07 S_C.P$4 S_V.P$4 S_B.P$4 S_N.P$4 | 53.87,32.58 S_X.P$4 79.67,32.58 v79.7,32.55 | 53.87,32.58 S_Z.P$4 | S_LSH.P$4 29.14,38.8 47.65,38.8 53.87,32.58
  Bottom 0.254: J6.50 80.7,60.8 81.85,59.65 v81.85,58.65 | v79.7,32.55 91.76,32.55 S_C.P$4
MY4  (via drill 0.35)  (8 unrouted)
  Top 0.254: S_LCT.P$4 28.58,13.58 29.15,14.15 32.5,14.15 33.15,13.5 37.09,13.5 S_LGU.P$4 52.48,13.58 52.9,14 56.1,14 56.6,13.5 60.84,13.5 | 60.84,13.5 S_LAL.P$4 64.17,13.58 68.3,9.45 116.25,9.45 121.3,14.5 128.7,14.5 129.7,13.5 132.09,13.5 S_SPC.P$4 138.17,13.58 145.45,6.3 161.8,6.3 169,13.5 195,13.5 195.75,14.25 198.45,14.25 199.2,13.5 203.34,13.5 S_FN1.P$4 218.58,13.58 219,14 224,14 224.42,13.58 S_RAL.P$4 242.08,13.58 242.5,14 246.6,14 247.1,13.5 250.84,13.5 S_RGU.P$4 265.58,13.58 266,14 270.3,14 270.8,13.5 274.58,13.5 S_RCT.P$4 | 60.84,13.5 60.84,17.84 64.75,21.75 75.9,21.75 76.4,22.25 76.4,23.5 81.6,28.7 81.6,36.6 88.75,43.75 88.75,50.65 92.25,54.15 92.25,55.95 91.28,56.92 84.58,56.92 83.8,57.7 81.5,57.7 80.9,58.3 v80.9,59.45
  Bottom 0.254: v80.9,59.45 80.2,60.15 J6.48
MY5  (via drill 0.35)  (6 unrouted)
  Top 0.254: v169.05,79.4 166,79.4 165.6,79 163,79 162.6,79.4 157.98,79.4 S_8.P$4 | v80.05,58.65 80.05,60.05 81,61 83.2,61 84.6,62.4 88.75,62.4 92.5,58.65 130.98,58.65 132.65,60.32 139.07,60.32 143.8,65.05 v143.8,71.2 | S_BSP.P$4 255.08,79.42 254.5,80 251.63,80 251.05,79.42 241.95,79.42 241.53,79 239.05,79 238.63,79.42 S-EQL.P$4 223,79.42 222.58,79 220.02,79 219.6,79.42 S_MIN.P$4 204,79.42 203.58,79 201,79 200.58,79.42 S_0.P$4 185,79.42 184.58,79 182,79 181.58,79.42 S_9.P$4
  Bottom 0.254: J6.46 79.7,59 v80.05,58.65 | S_9.P$2 169.07,79.42 v169.05,79.4 | S_8.P$2 154.66,77.46 148.4,71.2 v143.8,71.2
MY6  (via drill 0.35)  (2 unrouted)
  Top 0.254: S_BSL.P$4 257.13,60.42 254,63.55 v254,70.5 248.62,70.5 S_CB.P$4 244,70.58 243.58,71 240.82,71 240.4,70.58 v235,70.58 S_OB.P$4 225,70.58 224.48,71.1 221.97,71.1 221.45,70.58 v216,70.58 S_P.P$4 205.9,70.58 205.38,71.1 203.02,71.1 202.5,70.58 v197,70.58 S_O.P$4 186.85,70.58 186.43,71 183.92,71 183.5,70.58 v178,70.58 178,60.7 173.4,56.1 144.4,56.1 v144,56.5 | v79.2,57.95 79.2,59.95 80.8,61.55 83,61.55 84.38,62.93 88.95,62.93 92.68,59.2 130.8,59.2 132.45,60.85 138.5,60.85 139,61.35 v139,61.5
  Bottom 0.254: J6.44 v79.2,57.95 | S_CB.P$2 253.92,70.58 v254,70.5 | S_OB.P$2 v235,70.58 | S_P.P$2 v216,70.58 | S_O.P$2 v197,70.58 | S_I.P$2 v178,70.58 | v144,56.5 143.2,56.5 139,60.7 v139,61.5
MY7  (via drill 0.35)  (5 unrouted)
  Top 0.254: 265.25,51.5 S_ENT.P$4 260.75,51.58 260.23,52.1 257.52,52.1 257,51.58 253.65,51.58 252.87,50.8 248.48,50.8 247.7,51.58 S_QUO.P$4 229.85,51.58 229.28,52.15 226.52,52.15 225.95,51.58 S_SCL.P$4 210.85,51.58 210.28,52.15 207.72,52.15 207.15,51.58 S_L.P$4 192,51.58 191.58,52 188.42,52 188,51.58 S_K.P$4 173.32,55.55 146.05,55.55 v145.5,55 | v77.95,57.96 77.95,59.45 80.6,62.1 82.8,62.1 84.15,63.45 89.2,63.45 92.9,59.75 130.6,59.75 133.21,62.36 133.3,62.36 133.64,62.7 v139.8,62.7
  Bottom 0.254: J6.42 78.7,58.71 v77.95,57.96 | v139.8,62.7 139.8,60.63 142.99,57.44 144.16,57.44 145.5,56.1 v145.5,55
MY8  (via drill 0.35)  (5 unrouted)
  Top 0.254: S_RSH.P$4 260.33,32.5 250.5,32.5 249,31 244,31 242.42,32.58 S_FSL.P$4 S_DOT.P$4 S_COM.P$4 S_M.P$4 164.47,35.9 162.3,35.9 157.85,40.35 156.15,40.35 155.15,39.35 141.95,39.35 141.35,38.75 140.7,38.75 139.55,39.9 91.65,39.9 v91.6,39.95 | v77.05,58.65 77.05,57.65 77.7,57 83.75,57 84.35,56.4 90.85,56.4 91.7,55.55 91.7,54.35 88,50.65 88,45.05 v87.95,45
  Bottom 0.254: J6.40 78.2,59.8 v77.05,58.65 | v91.6,39.95 91.6,40 88,43.6 88,45 v87.95,45
N$1  (1 unrouted)
  Bottom 0.254: S_ESC.P$1 15.59,80.39 11.2,76 5,76 3.36,74.36 D1.A
N$2  (1 unrouted)
  Bottom 0.254: D2.A 32.3,87.94 32.3,87.3 32.58,87.02 33.72,87.02 35.15,85.59 35.15,83.91 34.59,83.35 S_1.P$1
N$3  (1 unrouted)
  Bottom 0.254: S_2.P$1 39.41,85.35 39.4,85.34 39.4,83.6 41.2,81.8 43,81.8 44.5,80.3 50.66,80.3 D3.A
N$4  (1 unrouted)
  Bottom 0.254: S_3.P$1 58.41,85.42 57.4,84.4 57.4,81.04 D4.A
N$5  (1 unrouted)
  Bottom 0.254: S_4.P$1 77.42,85.42 76.7,84.7 76.7,83.3 79.75,80.25 88.61,80.25 D5.A
N$6  (1 unrouted)
  Bottom 0.305: S_5.P$1 110.58,79.72 108.36,77.5 D6.A
N$7  (1 unrouted)
  Bottom 0.254: S_6.P$1 129.59,79.83 127.36,77.61 D7.A
N$8  (1 unrouted)
  Bottom 0.254: S_7.P$1 148.59,79.89 146.36,77.66 D8.A
N$9  (1 unrouted)
  Bottom 0.254: S_8.P$1 167.59,79.64 165.36,77.41 D9.A
N$10  (1 unrouted)
  Bottom 0.254: S_9.P$1 186.59,79.78 184.36,77.56 D10.A
N$11  (1 unrouted)
  Bottom 0.254: S_0.P$1 205.59,79.73 203.36,77.51 D11.A
N$12  (1 unrouted)
  Bottom 0.254: S_MIN.P$1 224.59,79.83 222.36,77.61 D12.A
N$13  (1 unrouted)
  Bottom 0.305: S-EQL.P$1 243.59,79.52 241.36,77.3 D13.A
N$14  (1 unrouted)
  Bottom 0.254: S_BSP.P$1 272.08,80.08 269.36,77.36 D14.A
N$15  (1 unrouted)
  Bottom 0.254: S_TAB.P$1 6.17,66.47 3.36,63.66 D15.A
N$16  (1 unrouted)
  Bottom 0.254: S_Q.P$1 29.91,62.42 D16.A
N$17  (1 unrouted)
  Bottom 0.254: S_W.P$1 48.91,66.42 48.36,65.86 D17.A
N$18  (1 unrouted)
  Bottom 0.254: S_E.P$1 67.88,68 67,68 61.38,62.38 D18.A
N$19  (1 unrouted)
  Bottom 0.254: S_R.P$1 86.92,73.92 87.88,74.88 D19.A
N$20  (1 unrouted)
  Bottom 0.254: D20.A 105.92,61.93 S_T.P$1 105.88,68
N$21  (1 unrouted)
  Bottom 0.254: S_Y.P$1 124.92,62.43 D21.A
N$22  (1 unrouted)
  Bottom 0.254: S_U.P$1 143.91,62.43 D22.A
N$23  (1 unrouted)
  Bottom 0.254: S_I.P$1 162.91,62.43 D23.A
N$24  (1 unrouted)
  Bottom 0.254: S_O.P$1 181.85,67.97 181.85,62.39 D24.A
N$25  (1 unrouted)
  Bottom 0.254: D25.A S_P.P$1
N$26  (1 unrouted)
  Bottom 0.254: S_OB.P$1 219.9,68.03 219.9,62.41 D26.A
N$27  (1 unrouted)
  Bottom 0.254: S_CB.P$1 238.87,67.99 D27.A
N$28  (1 unrouted)
  Bottom 0.254: S_BSL.P$1 276.83,64.53 278,65.7 278,68 277,69 271,69 269.36,70.64 D28.A
N$29  (via drill 0.35)
  Top 0.254: v95.5,88 93,85.5 93,83.5 90.25,80.75 86.4,80.75 80.65,75 69.4,75 v68.9,75.5 | v22,71.34 23.15,70.19 27.39,70.19 29,71.8 34.2,71.8 40.9,78.5 v48.05,78.5
  Bottom 0.254: LED-5.4-DIN 96.35,88.85 v95.5,88 | v68.9,75.5 68.5,75.5 65.76,78.24 48.81,78.24 48.55,78.5 v48.05,78.5 | v22,71.34 22,69 20.8,67.8 20.8,61.2 19.7,60.1 19.7,57.35 25.06,51.99 25.06,51.14 24,50.08 24,44.7 21.45,42.15 LED-CL.2-DOUT
N$30  (1 unrouted)
  Bottom 0.254: D30.A 46.95,43.12 47.88,44.05 48.2,44.05 50.25,46.1 50.25,53.55 49.25,54.55 38.05,54.55 34.66,51.16 S_A.P$1
N$31  (1 unrouted)
  Bottom 0.254: D31.A 53.66,43.32 S_S.P$1
N$32  (1 unrouted)
  Bottom 0.254: D32.A 72.67,43.32 72.65,43.34 72.65,47.34 72.67,47.35 S_D.P$1
N$33  (1 unrouted)
  Bottom 0.254: D33.A 91.67,43.32 S_F.P$1
N$34  (1 unrouted)
  Bottom 0.254: D34.A 110.67,43.32 S_G.P$1
N$35  (1 unrouted)
  Bottom 0.254: D35.A 135.16,40.66 136.5,42 144.5,42 145,42.5 145,53.15 137.8,60.35 132.65,60.35 129.66,57.37 S_H.P$1
N$36  (1 unrouted)
  Bottom 0.254: S_J.P$1 148.66,43.32 D36.A
N$37  (1 unrouted)
  Bottom 0.254: D37.A 167.66,43.32 S_K.P$1
N$38  (1 unrouted)
  Bottom 0.254: D38.A 186.66,43.32 S_L.P$1
N$39  (1 unrouted)
  Bottom 0.254: D39.A 205.66,43.32 S_SCL.P$1
N$40  (1 unrouted)
  Bottom 0.254: D40.A 224.66,43.32 S_QUO.P$1
N$41  (1 unrouted)
  Bottom 0.254: S_ENT.P$1 255.54,43.57 D41.A
N$42  (1 unrouted)
  Bottom 0.254: D42.A 13.14,23.57 13.14,29.89 S_LSH.P$1
N$43  (1 unrouted)
  Bottom 0.254: D43.A 44.02,23.77 44.02,29.89 S_Z.P$1
N$44  (1 unrouted)
  Bottom 0.254: D44.A 63.06,23.72 63.06,29.94 S_X.P$1
N$45  (1 unrouted)
  Bottom 0.254: S_C.P$1 82.06,29.94 82.06,23.57 D45.A
N$46  (1 unrouted)
  Bottom 0.254: D46.A 101.11,23.87 101.11,29.99 S_V.P$1
N$47  (1 unrouted)
  Bottom 0.254: D47.A 120.11,23.87 120.11,29.99 S_B.P$1
N$48  (1 unrouted)
  Bottom 0.254: S_N.P$1 139.06,29.94 139.06,23.92 D48.A
N$49  (1 unrouted)
  Bottom 0.254: D49.A 158.12,23.87 158.12,29.99 S_M.P$1
N$50  (1 unrouted)
  Bottom 0.254: S_COM.P$1 177.12,29.99 D50.A
N$51  (1 unrouted)
  Bottom 0.254: S_DOT.P$1 196.11,29.99 196.11,24.07 D51.A
N$52  (1 unrouted)
  Bottom 0.254: S_FSL.P$1 215.12,29.99 215.12,24.07 D52.A
N$53  (1 unrouted)
  Bottom 0.254: D53.A 250.74,24.07 250.74,29.99 S_RSH.P$1
N$54  (1 unrouted)
  Bottom 0.254: S_LCT.P$1 3.79,13.09 5.6,14.9 9.9,14.9 13,18 D54.A
N$55  (1 unrouted)
  Bottom 0.254: S_LGU.P$1 25.61,12.97 D55.A
N$56  (1 unrouted)
  Bottom 0.254: D56.A 51.29,16.98 S_LAL.P$1
N$57  (1 unrouted)
  Bottom 0.254: S_SPC.P$1 122.81,11.31 D57.A
N$58  (1 unrouted)
  Bottom 0.254: 193.7,16.49 D58.A 193.71,11.12 S_FN1.P$1
N$59  (1 unrouted)
  Bottom 0.254: S_RAL.P$1 217.56,11.06 D59.A
N$60  (1 unrouted)
  Bottom 0.254: D60.A 249.35,16.95 247.25,14.85 243.6,14.85 241.29,12.54 S_RGU.P$1
N$61  (1 unrouted)
  Bottom 0.254: D61.A 262.06,12.44 263.46,11.04 S_RCT.P$1
N$62  (1 unrouted)
  Bottom 0.254: D29.A 13.3,36.31 11.69,36.31 8.53,39.47 8.53,47.34 8.54,47.35 S_CPS.P$1
N$63  (1 unrouted)
  Bottom 0.254: LED-5.2-DOUT 109.65,90.35 111.15,88.85 119.46,88.85
N$64  (1 unrouted)
  Bottom 0.254: LED-6.2-DOUT 127.65,90.35 129.15,88.85 138.46,88.85
N$65  (1 unrouted)
  Bottom 0.254: LED-7.2-DOUT 146.65,90.35 148.15,88.85 157.46,88.85
N$67
  Bottom 0.254: R1.1 24.35,91 23.85,90.5 17.5,90.5 15.95,88.95 X1.A5
N$68
  Bottom 0.254: JP1.1 29,58 31,60 R3.2
N$69  (via drill 0.35)
  Top 0.254: v23.45,88.85 23.2,88.85 21.95,90.1 19.45,90.1 18.62,89.27 18.62,85.97 v18.15,85.5
  Bottom 0.254: R2.1 24.25,88.65 24.05,88.85 v23.45,88.85 | v18.15,85.5 18.95,86.3 X1.B5
N$70
  Bottom 0.254: LED-CL.4-DIN 11.65,40.65 11.5,40.5 11.5,39.5 12.65,38.35 IC1.4
N$71  (3 unrouted)
  Bottom 0.254: X1.M1 12.08,88.12 11.78,88.42 10.98,88.42 C6.1 R5.2 12,91 12.75,91.75 21.5,91.75
N$72
  Bottom 0.254: LED-8.2-DOUT 167.11,90.35 J4.2
PWM  (via drill 0.35)
  Top 0.254: v75.05,60.1 73.73,60.1 71.09,62.74 67.26,62.74 65.2,64.8 65.2,73.8 61.5,77.5 58.54,77.5 J3.2
  Bottom 0.254: J6.32 76.2,61.1 75.2,60.1 v75.05,60.1
SA1  (7 unrouted)
SA2  (7 unrouted)
SA3  (7 unrouted)
SC1  (5 unrouted)
SC2  (7 unrouted)
SG1  (5 unrouted)
SG4  (5 unrouted)
SINK  (via drill 0.35)
  Top 1.25: v36,21.5 v36,20 v36,18.5 | v36,18.5 v38,18.5 | v36,18.5 37.5,20 v38,20
  Top 1.5: v38,18.5 v40,18.5 v41.5,18.5 v41.5,20 v41.5,21.5 v41.5,23 v41.5,24.5 37.5,24.5 v36,23
  Top 2: v36,21.5 v34.5,23 v34.5,24.5 38.5,24.5 v40,23 | v40,23 v40,21.5 | v40,21.5 v40,20 v38,20 | v38,20 v38,21.5 | v38,21.5 v36,21.5 | v38,21.5 v40,21.5 | v40,23 v36,23 | v38,20 36.5,21.5 v36,21.5
  Bottom 1.25: v36,18.5 v38,18.5 | v36,18.5 v36,20 | v36,20 v36,21.5 | v36,20 v38,20 37.5,20 v36,18.5 | v38,21.5 v38,23 v36,23 | U1.4 38.9,23 v40,23
  Bottom 1.5: v38,20 v38,18.5 v40,18.5 | v40,18.5 v40,20 | v34.5,24.5 v41.5,24.5 v41.5,23 v41.5,21.5 v41.5,20 v41.5,18.5 v40,18.5
  Bottom 2: v34.5,23 v34.5,24.5 37.4,24.5 U1.4 | v34.5,23 v36,23 v36,21.5 | v36,21.5 v38,21.5 | v38,21.5 v38,20 v40,20 v40,21.5 | v40,21.5 v38,21.5 | v40,23 v40,21.5 | v34.5,23 v36,21.5
VBUS  (via drill 0.35)
  Top 0.508: v19,78.5 19.1,78.5 19.95,77.65 19.95,75.05 21,74 v26.5,74
  Bottom 0.508: X1.A4B9 14.8,86.2 18,83 | 18,83 18,80.5 17,79.5 U$7.P$1 v19,78.5 | X1.B4A9 19.6,86.4 20,86 20,85 18,83 | U$3.P$5 v26.5,74
VCC  (via drill 0.35)
  Top 0.254: v83.55,73.65 82.75,74.45 69.45,74.45 v66.75,71.75 66.3,71.3 66.3,65.9 v68.1,64.1
  Top 0.508: v41.95,43.1 49.6,43.1 51,44.5 51,51.6 53.2,53.8 v55.45,53.8
  Bottom 0.254: J6.2 68.7,63.5 v68.1,64.1 68.01,64.01 68.51,64.01 69.2,63.32 J6.4 | J6.74 86.7,64.25 83.55,67.4 v83.55,73.65 | v66.75,71.75 66.75,71.77 63.52,75 J3.4
  Bottom 0.508: D62.A 29,25.7 31.1,27.8 37.25,27.8 38,28.55 U1.2 38,34.85 C1.1 C2.1 C3.1 39.95,43.1 v41.95,43.1 | v55.45,53.8 57.8,53.8 68.01,64.01
VIN/3  (via drill 0.35)
  Top 0.254: v44.5,57 45.1,56.4 56.05,56.4 56.64,56.99 65.96,56.99 66.6,56.35 73.45,56.35 v73.9,56.8
  Bottom 0.254: R3.1 R4.2 v44.5,57 | J6.49 80.45,55.73 79.58,56.6 74.1,56.6 v73.9,56.8
VSUP  (via drill 0.35)  (3 unrouted)
  Top 0.254: v69,53 69,52.3 68.15,51.45 68.15,50.35 68.44,50.06 68.44,45.82 65.06,42.44 60.44,42.44 60,42 v52.5,42
  Top 0.508: v15,75.5 7.5,75.5 4,72 4,64 10,58 v26.5,58 | v108.1,88.8 113.05,83.85 113.05,75 | 132.1,75 151,75 | 151,75 168,75 170,77 J4.3 166.12,88.8 v165.7,88.8 | v146.1,88.8 147.2,88.8 151,85 151,75 | 132.1,75 132.1,84.9 128.2,88.8 v127.1,88.8 | 113.05,75 100.5,75 95.5,80 86.65,80 85,78.35 v85,78 | 132.1,75 113.05,75
  Bottom 0.254: J6.9 70.45,53.6 69.85,53 v69,53 | v52.5,42 51,42 | 18.67,40.65 18.67,40.5
  Bottom 0.508: v15,75.5 U$7.P$2 19,75.5 20,76.5 23.2,76.5 23.5,76.2 30.25,76.2 33.55,79.5 J2.1 39.15,79.5 39.65,79 46.15,79 47.65,77.5 65.5,77.5 68.65,74.35 82.15,74.35 85,77.2 v85,78 | 40,34.85 C4.1 | C4.1 C5.1 | D62.C 29,22 33.85,26.85 38.65,26.85 40.31,28.51 U1.3 40.31,31.79 40.15,31.95 40.15,32.6 | LED-5.1-VDD 108.05,88.85 v108.1,88.8 | v165.7,88.8 163.67,88.8 | LED-7.1-VDD 146.05,88.85 v146.1,88.8 | v127.1,88.8 127.05,88.85 125.67,88.85 | C4.1 40.15,32.6 | 40.15,32.6 43.7,32.6 51,39.9 51,42 51,54 49.7,55.3 31.8,55.3 29.3,55.3 JP1.2 28.71,55.3 27.2,55.3 | 27.2,55.3 26.5,56 v26.5,58 U$14.P$1 | 27.2,55.3 26.15,54.25 26.15,51.15 24.75,49.75 24.75,44.45 20.91,40.61 20.91,40.5 | 20.91,40.5 IC1.5 | LED-CL.1-VDD 20.76,40.65 20.91,40.5

## Text on the board
tPlace: tecsmith.com.au | MicroMod | (c) Vino Rodrigues
bPlace: CMN | CMN | AP2 | BOOT | GH60 | RESET | GH60 | GH60 | AP2 | AP2 | BOOT | GH60
Document: AP-3 / x136.2 y57.9 d2.5